# Altium PCB S1.PcbDoc
Units mil, origin at the board's own origin, x right, y up, seen from the top; angles counter-clockwise.
Board outline 2362.07 x 2362.07 mil, 2 copper layers (Top Layer, Bottom Layer), stack 61.855 mil thick; 51 components, 38 nets, 228 pads, 76 vias.
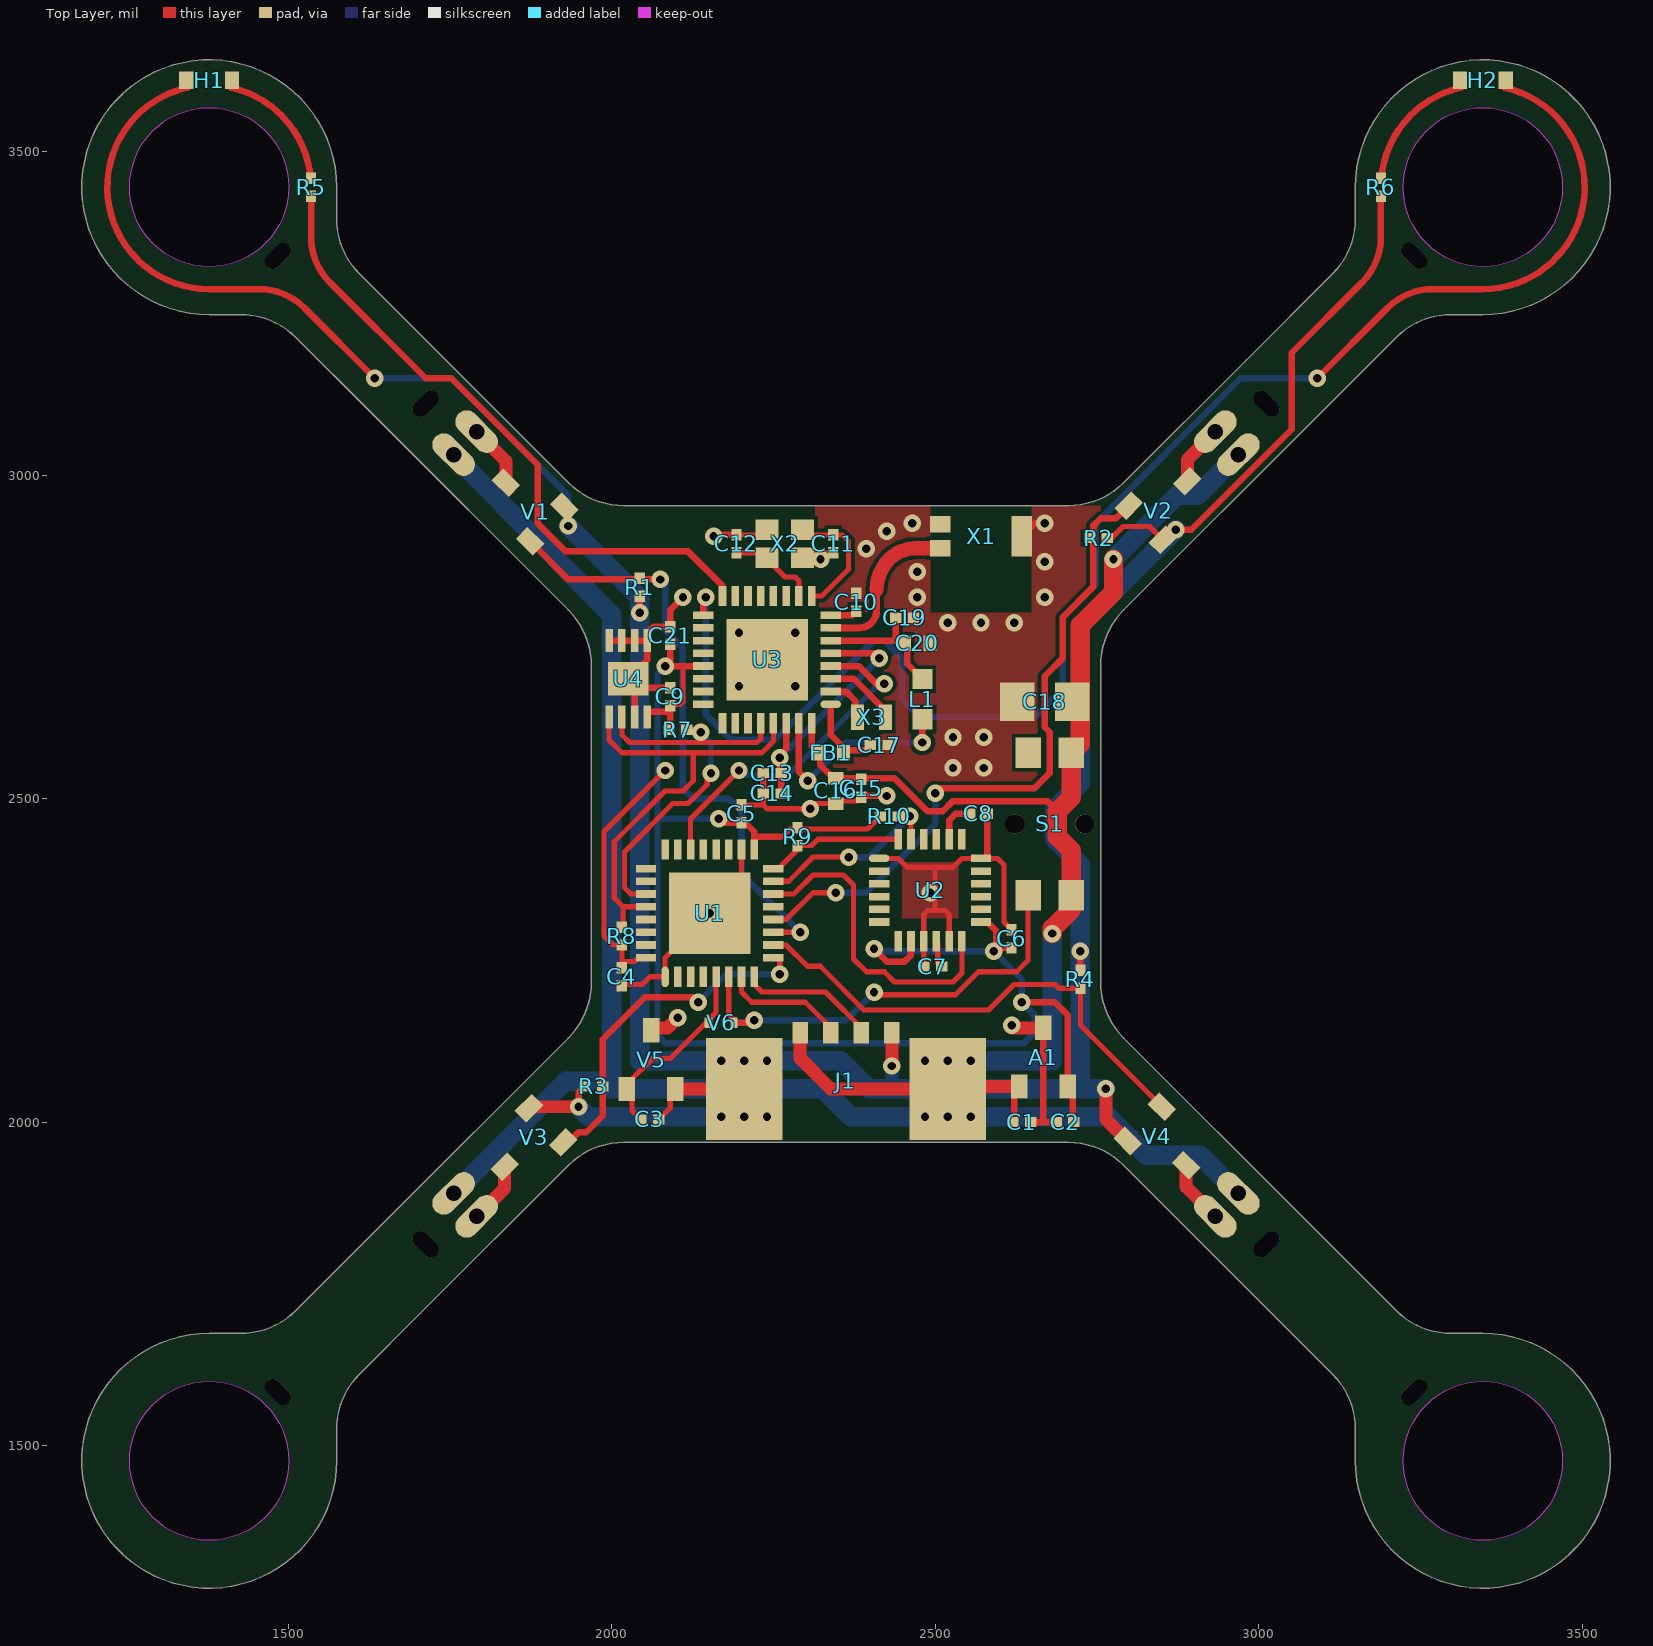
[diagram p0: Top Layer view]
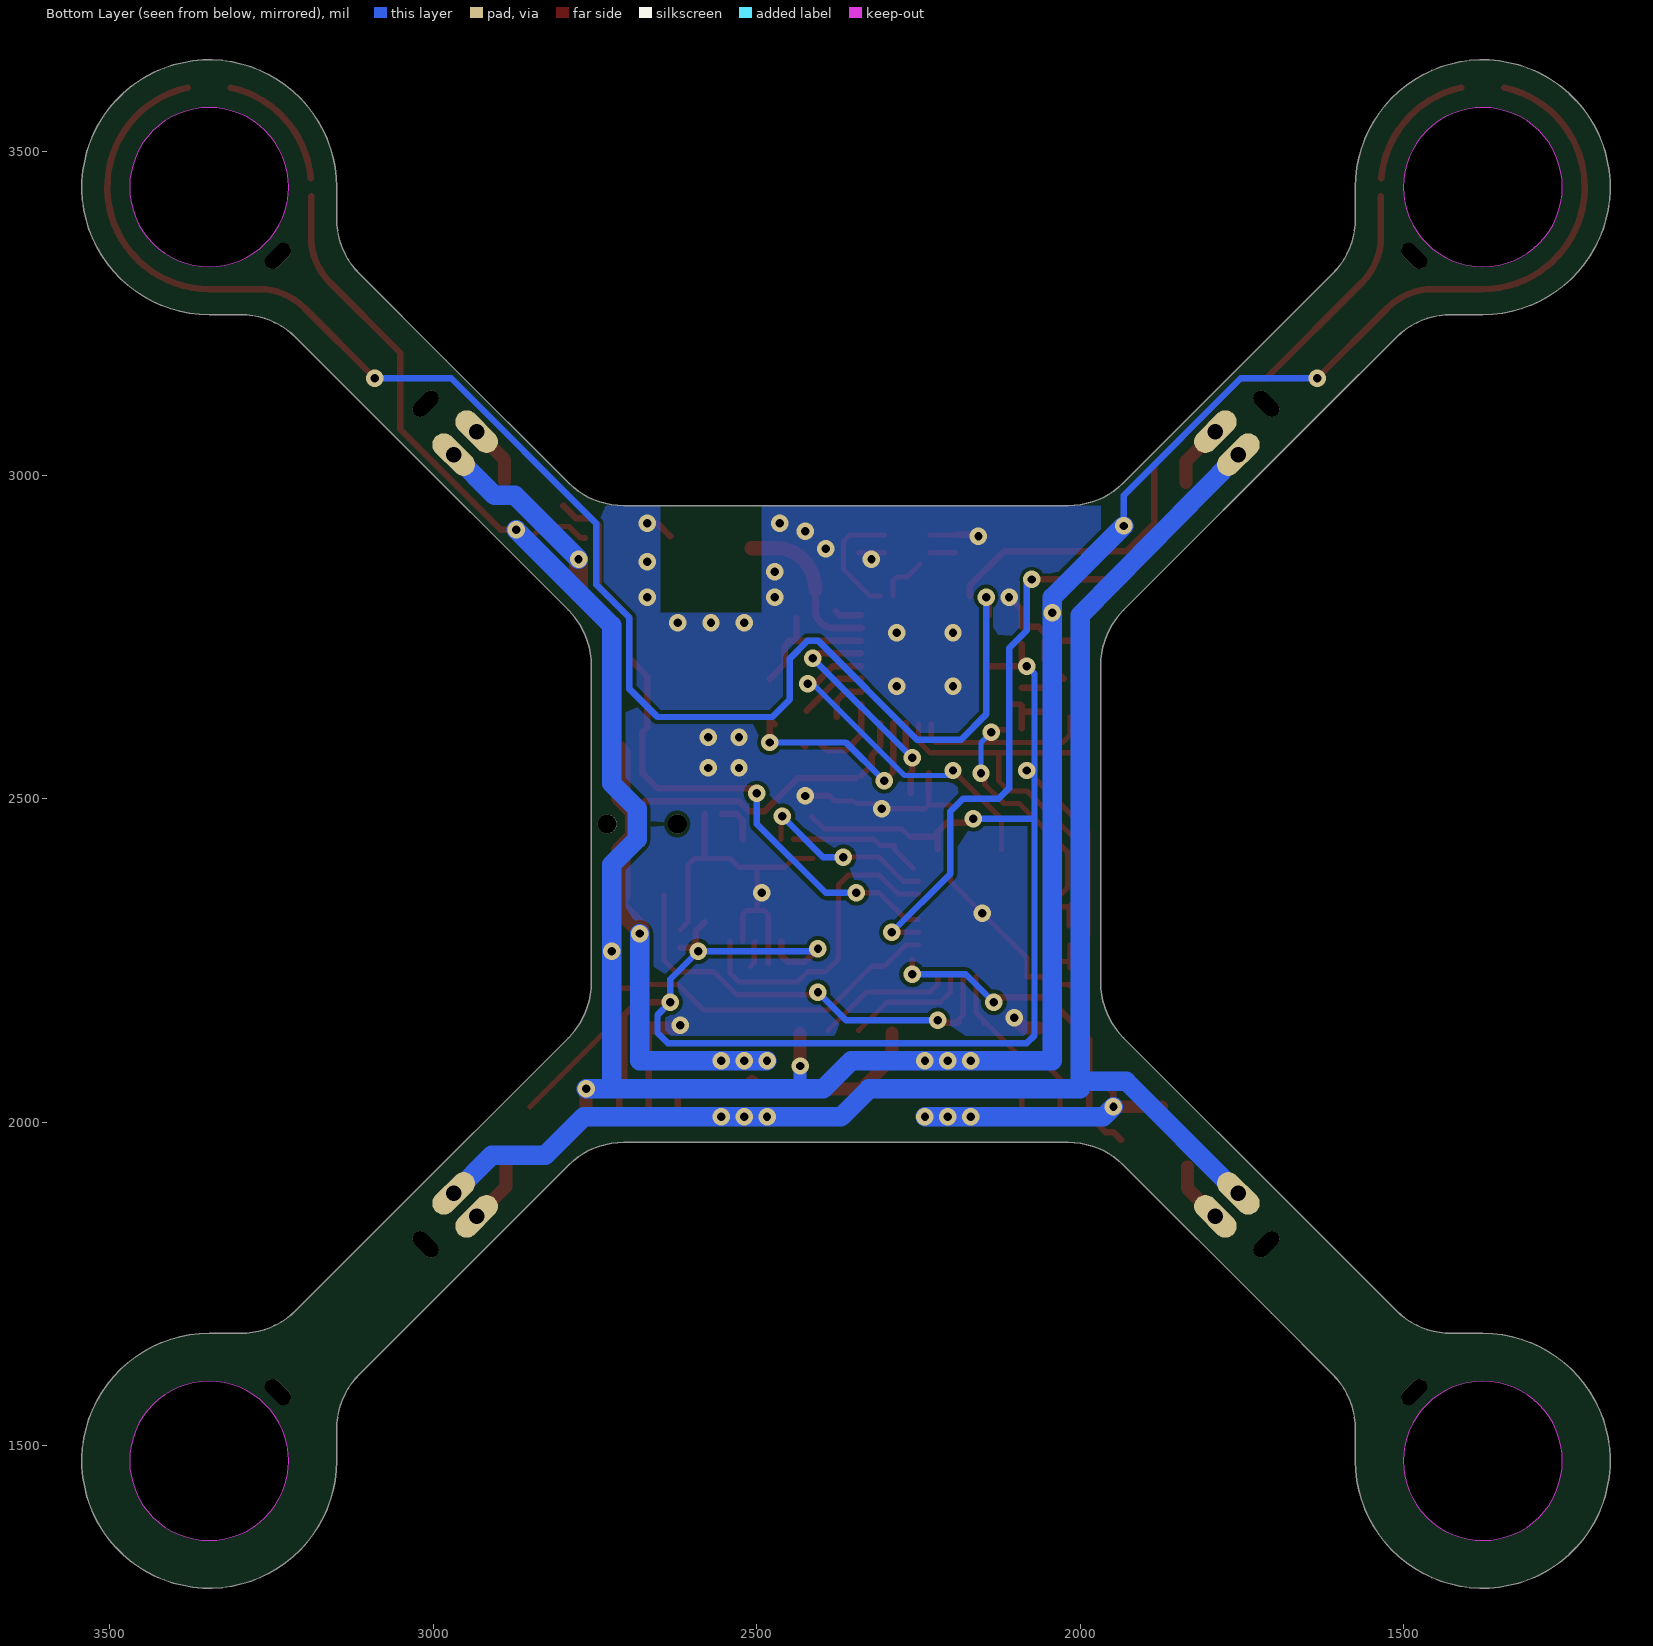
[diagram p1: Bottom Layer view, seen from below]

## Layer stack, top to bottom
Top Layer: signal copper 1.4
Dielectric: core 59.0551, FR-4, Dk 4.8
Bottom Layer: signal copper 1.4

## Board outline
1377.95,1673.23 1426.38,1673.23 ccw(c1426.38,1793.94) 1511.73,1708.58 1643.7,1840.55 1933.15,2130 ccw(c1847.79,2215.35) 1968.5,2215.35 1968.5,2705.91 ccw(c1847.79,2705.91) 1933.15,2791.26 1625.98,3098.43 1511.73,3212.68 ccw(c1426.38,3127.32) 1426.38,3248.03 1377.95,3248.03 cw(c1377.95,3444.88) 1574.8,3444.88 1574.8,3396.46 ccw(c1695.51,3396.46) 1610.16,3311.1 1692.91,3228.35 1933.15,2988.11 ccw(c2018.5,3073.47) 2018.5,2952.76 2705.91,2952.76 ccw(c2705.91,3073.47) 2791.26,2988.11 2980.32,3177.17 3114.25,3311.1 ccw(c3028.9,3396.46) 3149.61,3396.46 3149.61,3444.88 cw(c3346.46,3444.88) 3346.46,3248.03 3298.03,3248.03 ccw(c3298.03,3127.32) 3212.68,3212.68 3092.52,3092.52 2791.26,2791.26 ccw(c2876.62,2705.91) 2755.91,2705.91 2755.91,2215.35 ccw(c2876.62,2215.35) 2791.26,2130 3080.71,1840.55 3212.68,1708.58 ccw(c3298.03,1793.94) 3298.03,1673.23 3346.46,1673.23 cw(c3346.46,1476.38) 3149.61,1476.38 3149.61,1524.8 ccw(c3028.9,1524.8) 3114.25,1610.16 2994.09,1730.32 2791.26,1933.15 ccw(c2705.91,1847.79) 2705.91,1968.5 2018.5,1968.5 ccw(c2018.5,1847.79) 1933.15,1933.15 1704.72,1704.72 1610.16,1610.16 ccw(c1695.51,1524.8) 1574.8,1524.8 1574.8,1476.38 cw(c1377.95,1476.38)
cut-out: 1377.95,3321.85 cw(c1377.95,3444.88) 1254.92,3444.88 cw(c1377.95,3444.88) 1377.95,3567.91 cw(c1377.95,3444.88) 1500.98,3444.88 cw(c1377.95,3444.88)
cut-out: 3346.46,3321.85 cw(c3346.46,3444.88) 3223.43,3444.88 cw(c3346.46,3444.88) 3346.46,3567.91 cw(c3346.46,3444.88) 3469.49,3444.88 cw(c3346.46,3444.88)
cut-out: 3346.46,1353.35 cw(c3346.46,1476.38) 3223.43,1476.38 cw(c3346.46,1476.38) 3346.46,1599.41 cw(c3346.46,1476.38) 3469.49,1476.38 cw(c3346.46,1476.38)
cut-out: 1377.95,1353.35 cw(c1377.95,1476.38) 1254.92,1476.38 cw(c1377.95,1476.38) 1377.95,1599.41 cw(c1377.95,1476.38) 1500.98,1476.38 cw(c1377.95,1476.38)

## Design rules (kind name [scope] priority, off if disabled: settings)
Clearance [All] p1: gap=6
MinimumSolderMaskSliver [All] p1 off: minsoldermaskwidth=10
PolygonConnect [All] p1: connectstyle=Direct reliefconductorwidth=10 reliefentries=4 polygonreliefangle="90 Angle"
RoutingVias [All] p1: holewidth=28 width=50 viastyle="Through Hole" minholewidth=28 minwidth=50 maxholewidth=28 maxwidth=50
SilkscreenOverComponentPads [All] p1: minsilkscreentomaskgap=10
SolderMaskExpansion [All] p1: expansion=4
Width [All] p1: maxlimit=100 minlimit=8 preferedwidth=8
26 further rules are at their usual default settings.

## Components (designator, comment, footprint, x,y, rotation, side; value= is the part's Value field where it differs from the comment)
A1 "AP7333-28SA" SOT23 2629.92,2055.12 r90 top
C1 "Cap 1µF" "0201 (C)" 2633.86,2000 r0 top
C2 "Cap 1µF" "0201 (C)" 2700.79,2000 r180 top
C3 "Cap 100nF" "0201 (C)" 2059.06,2003.94 r0 top
C4 "Cap 100nF" "0201 (C)" 2015.75,2224.41 r270 top
C5 "Cap 100nF" "0201 (C)" 2200.79,2476.38 r270 top
C6 "Cap 100nF" "0201 (C)" 2618.11,2283.46 r90 top
C7 "Cap 100nF" "0201 (C)" 2496.06,2240.16 r0 top
C8 "Cap 2.2nF" "0201 (C)" 2566.93,2476.38 r0 top
C9 "Cap 100nF" "0201 (C)" 2090.55,2657.48 r90 top
C10 "Cap 470nF" "0201 (C)" 2377.95,2803.15 r90 top
C11 "Cap 15pF" "0201 (C)" 2342.52,2893.7 r90 top
C12 "Cap 8.2pF" "0201 (C)" 2192.91,2893.7 r90 top
C13 "Cap 470nF" "0201 (C)" 2248.03,2539.37 r0 top
C14 "Cap 150nF" "0201 (C)" 2248.03,2507.87 r180 top
C15 "Cap 47nF" "0201 (C)" 2385.83,2515.75 r90 top
C16 "Cap 2.2µF" "0402 (C)" 2346.46,2511.81 r90 top
C17 "Cap 33pF" "0201 (C)" 2413.39,2582.68 r180 top
C18 "Cap 47µF" "0805 (C)" 2669.29,2649.61 r0 top
C19 "Cap 470nF" "0201 (C)" 2452.76,2779.53 r180 top
C20 "Cap 2.2µF" "0402 (C)" 2472.44,2740.16 r0 top
C21 "Cap 47nF" "0201 (C)" 2090.55,2751.97 r90 top
FB1 "MMZ1005Y152C" "0402 (R)" 2338.58,2570.87 r180 top net-tie
H1 "LED1" KLTFSN2K5200 1342.52,3610.24 r0 top
H2 "LED1" KLTFSN2K5200 3311.02,3610.24 r0 top
J1 "Pico-EZMate" "PICO-EZMATE (4PIN)" 2362.2,2137.8 r0 top
L1 "L 4.7µH" "0603 (L)" 2480.32,2653.54 r270 top
R1 "Res 10k" "0201 (R)" 2043.31,2826.77 r270 top
R2 "Res 10k" "0201 (R)" 2752.56,2902.65 r180 top
R3 "Res 10k" "0201 (R)" 1972.44,2055.12 r180 top
R4 "Res 10k" "0201 (R)" 2724.41,2220.47 r270 top
R5 "Res 100R" "0201 (R)" 1535.43,3444.88 r90 top
R6 "Res 100R" "0201 (R)" 3188.98,3444.88 r270 top
R7 "Res 4k7" "0201 (R)" 2102.36,2606.3 r0 top
R8 "Res 4k7" "0201 (R)" 2015.75,2287.4 r90 top
R9 "Res 4k7" "0201 (R)" 2287.4,2440.94 r270 top
R10 "Res 4k7" "0201 (R)" 2429.13,2472.44 r0 top
S1 "TL1014BF160QG" "SWITCH RIGHT ANGLE" 2677.17,2460.63 r270 top
U1 "Xmega32E5" "QFN-32 (5X5MM)" 2082.68,2224.41 r90 top
U2 "MPU6050" "LQFN24 (4x4mm)" 2413.39,2407.48 r0 top
U3 "CSR1010" "QFN-32 (5X5MM)" 2338.58,2645.67 r180 top
U4 "AT24C512C" "UDFN-8 (3X2MM)" 2055.12,2744.09 r270 top
V1 "DMG2302U" SOT23 1874.02,2897.64 r135 top
V2 "DMG2302U" SOT23 2799.21,2952.76 r45 top
V3 "DMG2302U" SOT23 1925.2,1968.5 r225 top
V4 "DMG2302U" SOT23 2850.39,2023.62 r315 top
V5 "DMG2302U" SOT23 2023.62,2051.18 r90 top
V6 "1N4148W" SOD923 2169.29,2153.54 r0 top
X1 "W3008" "ANTENNA 3.2X1.6MM (W3008)" 2570.87,2905.51 r180 top
X2 "8Y-16.000MAAV-T" "CRYSTAL 1.6MM X 2MM" 2267.72,2893.7 r180 top
X3 "ABS05-32.768KHZ-9-T" "CRYSTAL 1MM X 1.6MM" 2401.57,2625.98 r180 top

## Footprints (in the part's own frame and the unit in brackets; to place one, negate y for a bottom-side part, rotate by r counter-clockwise, add the part's x,y. Pads: shape width x height; smd on the part's side, far side on the other; paste and mask are expansions set on the pad)
"0201 (C)" [mm]
  rect 0.45x0.4 smd: 1(-0.35,0) 2(0.35,0)
  body extent -0.35,-0.15 0.35,0.15, height 0.3
"0201 (R)" [mm]
  rect 0.45x0.4 smd: 1(-0.35,0) 2(0.35,0)
  body extent -0.35,-0.15 0.35,0.15, height 0.3
"0402 (C)" [mm]
  rect 0.5x0.6 smd: 1(-0.5,0) 2(0.5,0)
  body extent -0.5,-0.25 0.5,0.25, height 0.41
"0402 (R)" [mm]
  rect 0.5x0.6 smd: 1(-0.5,0) 2(0.5,0)
  body extent -0.5,-0.25 0.5,0.25, height 0.3
"0603 (L)" [mil]
  rect 31x31 smd: 1(-31,0) 2(31,0)
  body extent -31,-16 32,16, height 31
"0805 (C)" [mm] "Chip Resistor, 2-Leads, Body 2.0x1.3mm, IPC Low Density"
  rect 1.35x1.5 smd: 1(-1.075,0) 2(1.075,0)
  body extent -1.07,-0.7 1.08,0.7, height 1
"ANTENNA 3.2X1.6MM (W3008)" [mm]
  rect 0.8x0.65 smd: 1(1.6,0.475) 2(1.6,-0.475)
  rect 0.8x1.6 smd: 3(-1.6,0)
  body extent -1.6,-0.8 1.6,0.8, height 1.1
"CRYSTAL 1.6MM X 2MM" [mm]
  rect 0.9x0.8 smd: 1(-0.7,-0.55) 2(0.7,-0.55) 3(0.7,0.55) 4(-0.7,0.55)
  body extent -1,-0.8 1,0.8, height 0.5
"CRYSTAL 1MM X 1.6MM" [mm]
  rect 0.5x1 smd: 1(-0.55,0) 2(0.55,0)
  body extent -0.8,-0.5 0.8,0.5, height 0.5
KLTFSN2K5200 [mm]
  rect 0.56x0.68 smd: 1(1.8,0) 2(0,0)
  body extent 0,-0.35 1.83,0.75, height 0.4
"LQFN24 (4x4mm)" [mm]
  oval 0.8x0.3 smd: 1(0,0)
  rect 0.8x0.3 smd: 2(0,-0.5) 3(0,-1) 4(0,-1.5) 5(0,-2) 6(0,-2.5) 13(4,-2.5) 14(4,-2) 15(4,-1.5) 16(4,-1) 17(4,-0.5) 18(4,0)
  rect 0.3x0.8 smd: 7(0.75,-3.25) 8(1.25,-3.25) 9(1.75,-3.25) 10(2.25,-3.25) 11(2.75,-3.25) 12(3.25,-3.25) 19(3.25,0.75) 20(2.75,0.75) 21(2.25,0.75) 22(1.75,0.75) 23(1.25,0.75) 24(0.75,0.75)
  body extent 0,-3.25 4,0.75, height 0.9
"PICO-EZMATE (4PIN)" [mm]
  rect 0.7x0.8 smd: 0a(-2.95,-3.775) 0b(2.95,-3.775)
  rect 0.6x0.85 smd: 1(-1.8,0) 2(-0.6,0) 3(0.6,0) 4(1.8,0)
  body extent -3.3,-4.3 3.3,0.2, height 1.55
"QFN-32 (5X5MM)" [mm]
  rect 3.2x3.2 smd: 0(2.5,-1.75)
  oval 0.8x0.3 smd: 1(0,0)
  rect 0.8x0.3 smd: 2(0,-0.5) 3(0,-1) 4(0,-1.5) 5(0,-2) 6(0,-2.5) 7(0,-3) 8(0,-3.5) 17(5,-3.5) 18(5,-3) 19(5,-2.5) 20(5,-2) 21(5,-1.5) 22(5,-1) 23(5,-0.5) 24(5,0)
  rect 0.3x0.8 smd: 9(0.75,-4.25) 10(1.25,-4.25) 11(1.75,-4.25) 12(2.25,-4.25) 13(2.75,-4.25) 14(3.25,-4.25) 15(3.75,-4.25) 16(4.25,-4.25) 25(4.25,0.75) 26(3.75,0.75) 27(3.25,0.75) 28(2.75,0.75) 29(2.25,0.75) 30(1.75,0.75) 31(1.25,0.75) 32(0.75,0.75)
  body extent 0,-4.25 5,0.75, height 0.55
SOD923 [mm]
  rect 0.3x0.4 smd: A(0.5,0) K(-0.5,0)
  body extent -0.42,-0.3 0.43,0.3, height 0.38
SOT23 [mm]
  rect 0.95x0.65 smd: 1(0,0) 2(0,-1.9) 3(2.3,-0.95)
  body extent -0.05,-2.4 2.35,0.5, height 1.3
"SWITCH RIGHT ANGLE" [mm]
  rect 1.2x1 smd: 1(2.8,0.85) 2(2.8,-0.85) 3(-2.8,0.85) 4(-2.8,-0.85)
  round 0.75 hole 0.75 unplated: ""(0,1.375)
  oval 0.75x0.7 hole 0.75 unplated: ""(0,-1.375)
  body extent -3.2,-1.75 3.2,2.75, height 1.65
"UDFN-8 (3X2MM)" [mm]
  rect 1.3x1.6 smd: 0(1.5,-0.75)
  rect 0.9x0.3 smd: 1(0,0) 2(0,-0.5) 3(0,-1) 4(0,-1.5) 5(3,-1.5) 6(3,-1) 7(3,-0.5) 8(3,0)
  body extent 0,-1.75 3,0.25, height 0.6

## Part data
A1: "Low Dropout Regulator 2.8V, 300mA"
C1 C2: "Ceramic Capacitor 1µF"
C3 C4 C5 C6 C7 C9: "Ceramic Capacitor 100nF"
C8: "Ceramic Capacitor 2.2nF"
C10 C13 C19: "Ceramic Capacitor 470nF"
C11: "Ceramic Capacitor 15pF"
C12: "Ceramic Capacitor 8.2pF"
C14: "Ceramic Capacitor 150nF"
C15 C21: "Ceramic Capacitor 47nF"
C16 C20: "Ceramic Capacitor 2.2µF"
C17: "Ceramic Capacitor 33pF"
C18: "Ceramic Capacitor 47µF"
FB1: library part Filter, "HF Filter"
H1 H2: "Side View LED"
J1: library part "S1 Connector", "Programming & Charging Connector for S1"
L1: "Inductor 4.7µH"
R1 R2 R3 R4: "Resistor 10k"
R5 R6: "Resistor 100R"
R7 R8 R9 R10: "Resistor 4k7"
S1: "Tactile Switch, Right Angle"
U1: "8-Bit AVR Microcontroller"
U2: "9DOF Motion Processing Unit"
U3: "Bluetooth v4.0 Low Energy Chip"
U4: library part AT24C512C-MAHM, "512kbit I2C EEPROM"
V1 V2 V3 V4 V5: "MOSFET N-Channel"
V6: library part Diode, "Diode"
X1: library part "Antenna 2.4GHz", "Antenna 2.4GHz"
X2: library part "Crystal 16MHz", "Crystal 16MHz"
X3: library part "Crystal 32.768kHz", "Crystal 32.768kHz"

## Free pads (board coordinates)
  rect 118.11x157.48 smd: +(2519.68,2051.18) -(2204.72,2051.18)
  oval 47.24x23.62 hole 23.62 slot 47.24 at 135 deg unplated rot 135: ""(1484.25,1582.68) ""(1712.6,1811.02) ""(3011.81,3110.24) ""(3240.16,3338.58)
  oval 47.24x23.62 hole 23.62 slot 47.24 at 45 deg unplated rot 45: ""(1484.25,3338.58) ""(1712.6,3110.24) ""(3011.81,1811.02) ""(3240.16,1582.68)
  oval 35.43x78.74 hole 23.62 rot 45: ""(1755.91,3031.5) ""(1791.34,3066.93) ""(2933.07,1854.33) ""(2968.5,1889.76)
  oval 35.43x78.74 hole 23.62 rot 135: ""(1755.91,1889.76) ""(1791.34,1854.33) ""(2933.07,3066.93) ""(2968.5,3031.5)

## Via types
v1: diameter 27, hole 13, Top Layer to Bottom Layer, tented both sides, 76 vias

## Nets (pads, with @x,y where several pads share a name; then routed paths per layer and width w, separated by ;. In a path a pad name is that pad's centre, name@x,y a point inside that pad or via, vN(x,y) a via of type N, cw(c..) or ccw(c..) an arc to the next point about the centre after c; other vN are vias at no path point)
BAT+: A1.1 C1.1 C15.2 C16.2 C18.2 FB1.2 J1.0b J1.1 pad.+ pad.@1755.91,1889.76 pad.@1755.91,3031.5 pad.@2968.5,1889.76 pad.@2968.5,3031.5 S1.1 S1.3 U3.32 | length 4598.4
  Top Layer w10: U3.32 2309.05,2580.71 FB1.2 ; FB1.2@2322.58,2567.18 2322.58,2551.43 C16.2@2338.58,2535.43 ; C16.2 2437.01,2531.5 2488.19,2480.32 2511.81,2480.32 2527.56,2496.06 2673.23,2496.06 2688.98,2480.32 ; C1.1 2622.05,2001.97 A1.1@2622.05,2047.24
  Top Layer w20: J1.1 2291.34,2098.43 2338.58,2051.18 2496.06,2051.18 pad.+@2507.87,2062.99 ; pad.+@2523.62,2055.12 A1.1
  Top Layer w30: v1(2681.1,2291.34) 2681.1,2299.21 S1.1@2710.63,2328.74 ; S1.1 2710.63,2419.29 2688.98,2440.94 2688.98,2480.32 2710.63,2501.97 S1.3 2724.41,2584.65 2724.41,2767.72 2775.59,2818.9 v1(2775.59,2870.08)
  Bottom Layer w30: pad.@1755.91,1889.76 1929.13,2062.99 2000,2062.99 ; pad.@1755.91,3031.5 2000,2783.46 2000,2051.18 2326.77,2051.18 2370.08,2007.87 v1(2484.25,2007.87) v1(2519.69,2007.87) v1(2555.12,2007.87) 2767.72,2007.87 2826.77,1948.82 2909.45,1948.82 pad.@2968.5,1889.76 ; v1(2484.25,2094.49) v1(2519.69,2094.49) v1(2555.12,2094.49) 2681.1,2094.49 v1(2681.1,2291.34) ; v1(2775.59,2870.08) 2874.02,2968.5 2905.51,2968.5 pad.@2968.5,3031.5
BAT-: C3.2 H1.2 J1.0a J1.4 pad.- R1.2 R2.1 R3.2 R4.1 R6.2 V1.2 V2.2 V3.2 V4.2 V5.2 | length 5308.9
  Top Layer w8: C3.2 2090.55,2021.65 V5.2@2090.55,2043.31 ; R2.1@2772.73,2902.65 2790.56,2920.48 2831.48,2920.48 V2.2
  Top Layer w10: H1.2@1344.96,3598.87 ccw(c1377.95,3444.88) 1377.95,3287.4 1454.64,3287.4 cw(c1454.64,3187.4) 1525.35,3258.11 v1(1633.86,3149.61) ; v1(1948.82,2023.62) 1948.82,2045.28 R3.2 ; v1(2043.31,2787.4) R1.2 ; R4.1 v1(2724.41,2263.78) ; R2.1 R2.1@2769.05,2902.65 ; v1(2872.05,2915.35) 2895.67,2915.35 3051.18,3070.87 3051.18,3188.98 3159.69,3297.48 ccw(c3088.98,3368.19) 3188.98,3368.19 R6.2
  Top Layer w20: V3.2@1874.53,2023.62 v1(1948.82,2023.62) ; V5.2 pad.- ; v1@2433.07,2089.57 J1.4 ; v1(2763.78,2051.18) 2763.78,2004.45 V4.2
  Bottom Layer w10: v1(1633.86,3149.61) 1751.97,3149.61 1933.07,2968.5 v1(1933.07,2921.26)
  Bottom Layer w20: 2433.07,2051.18 v1(2433.07,2086.61)
  Bottom Layer w30: v1(1933.07,2921.26) 2043.31,2811.02 v1(2043.31,2787.4) 2043.31,2094.49 v1(2169.29,2094.49) v1(2204.72,2094.49) v1(2240.16,2094.49) 2354.33,2094.49 2397.64,2051.18 2433.07,2051.18 2724.41,2051.18 ; v1(1948.82,2023.62) 1964.57,2007.87 v1(2169.29,2007.87) v1(2204.72,2007.87) v1(2240.16,2007.87) ; v1(2763.78,2051.18) 2724.41,2051.18 ; v1(2872.05,2915.35) 2724.41,2767.72 2724.41,2523.62 2685.04,2484.25 2685.04,2437.01 2724.41,2397.64 v1(2724.41,2263.78) 2724.41,2051.18
GND: A1.3 C1.2 C2.2 C4.2 C5.1 C6.2 C7.1 C8.2 C9.2 C10.2 C11.1 C12.2 C13.1 C14.2 C15.1 C16.1 C17.1 C18.1 C19.1 C20.2 C21.2 U1.0 U1.1 U1.18 U2.1 U2.9 U2.11 U2.18 U3.0 U4.0 U4.1 U4.2 U4.3 U4.4 U4.7 V5.3 X1.2 X1.3 X2.2 X2.4 | length 1965.4
  Top Layer w8: C4.2 2017.72,2212.6 2047.24,2212.6 2059.06,2224.41 U1.1 2082.68,2253.93 v1(2151.58,2322.83) 2200.79,2372.04 U1.18 ; C12.2 X2.2@2232.28,2907.48 ; C5.1 2234.25,2490.16 ; C14.2 2234.25,2490.16 ; X2.4@2303.15,2879.92 C11.1 ; C16.1 2303.15,2492.13 2295.28,2484.25 2240.16,2484.25 2234.25,2490.16 ; C16.1@2350.39,2496.06 2379.92,2496.06 C15.1 ; U2.1 2442.91,2407.48 2456.69,2393.7 2500,2393.7 ; C7.1@2482.28,2244.09 U2.9 2482.28,2320.87 2488.19,2326.77 2500,2326.77 ; U2.11 2521.65,2320.87 2515.75,2326.77 2500,2326.77 ; C6.2 2606.3,2309.06 2606.3,2397.64 2596.46,2407.48 U2.18 2541.34,2407.48 2527.56,2393.7 2500,2393.7 ; 2500,2326.77 2500,2393.7
  Top Layer w10: U4.4 U4.3 U4.2 U4.1 2055.12,2714.57 U4.0 ; U4.7 U4.0@2035.43,2675.2 ; U4.0@2039.37,2671.26 C9.2 ; U4.1@2055.12,2755.91 2064.96,2765.75 C21.2 2090.55,2791.34 v1(2110.24,2811.02) ; v1(2157.48,2905.51) 2159.45,2907.48 C12.2 ; C14.2 C13.1 ; C15.1@2387.8,2503.94 v1(2425.2,2503.94) ; C17.1@2425.2,2580.71 C17.1 ; U2.18@2580.71,2409.45 C8.2 ; X1.3 2653.54,2925.2 v1(2669.29,2925.2) ; C1.2 C2.2 ; 2667.32,2001.97 A1.3
  Top Layer w20: V5.3@2064.96,2145.67 2086.61,2145.67 v1(2102.36,2161.42) ; v1@2618.11,2145.67 A1.3
  other v1: 2618.11,2149.61 2492.13,2354.33 2307.09,2484.25 2527.56,2547.24 2574.8,2547.24 2527.56,2594.49 2574.8,2594.49 2196.85,2673.23 2283.46,2673.23 2196.85,2755.91 2283.46,2755.91 2519.68,2771.65 2570.87,2771.65 2622.05,2771.65 2472.44,2811.02 2669.29,2811.02 2472.44,2850.39 2669.29,2866.14 2322.83,2870.08 2393.7,2885.83 2425.2,2913.39 2464.57,2925.2
NetC3_1: C3.1 U1.5 V5.1 V6.K | length 287.6
  Top Layer w8: V5.1@2023.62,2059.05 2062.99,2098.43 2090.55,2098.43 V6.K@2145.67,2153.54 ; V5.1@2031.5,2043.31 2031.5,2017.72 C3.1 ; V6.K V6.K@2145.67,2153.54 ; U1.5 2161.42,2169.29 V6.K@2145.67,2153.54
NetC7_2: C7.2 U2.10 | length 42.6
  Top Layer w8: U2.10 2503.94,2277.56 2503.94,2246.06 C7.2
NetC8_1: C8.1 U2.20 | length 65.1
  Top Layer w10: U2.20 2521.65,2466.54 2531.5,2476.38 C8.1
NetC10_1: C10.1 U3.8 | length 41.8
  Top Layer w10: U3.8 2372.05,2783.46 C10.1
NetC11_2: C11.2 U3.9 X2.1 | length 184.6
  Top Layer w8: X2.1@2303.15,2907.48 C11.2 2356.3,2907.48 2366.14,2897.64 2366.14,2854.33 2324.8,2812.99 U3.9
NetC12_1: C12.1 U3.10 X2.3 | length 114.9
  Top Layer w8: C12.1 X2.3@2232.28,2879.92 ; X2.3@2248.03,2862.2 2267.72,2842.52 2283.46,2842.52 2289.37,2836.61 U3.10
NetC17_2: C17.2 FB1.1 U3.1 | length 121.3
  Top Layer w10: U3.1 2338.58,2598.43 2362.2,2574.8 2391.73,2574.8 C17.2
NetC19_2: C19.2 C20.1 L1.1 U3.6 | length 212.7
  Top Layer w10: U3.6 C20.1@2450.79,2744.09 ; 2438.98,2746.06 C19.2 ; C20.1 2456.69,2736.22 2456.69,2708.17 L1.1
NetH1_1: H1.1 R5.2 | length 200.4
  Top Layer w10: H1.1@1410.95,3598.87 cw(c1377.95,3444.88) R5.2@1534.83,3458.61
NetH2_1: H2.1 U3.17 | length 2422.3
  Top Layer w10: U3.17 v1@2141.73,2807.09 ; v1(3090.55,3149.61) 3199.06,3258.11 cw(c3269.77,3187.4) 3269.77,3287.4 3346.46,3287.4 ccw(c3346.46,3444.88) H2.1@3379.45,3598.87
  Bottom Layer w10: v1(2145.67,2811.02) 2145.67,2629.92 2185.04,2590.55 2251.97,2590.55 2405.51,2744.09 2421.26,2744.09 2448.82,2716.54 2448.82,2653.54 2476.38,2625.98 2653.54,2625.98 2696.85,2669.29 2696.85,2779.53 2748.03,2830.71 2748.03,2925.2 2972.44,3149.61 v1(3090.55,3149.61)
NetH2_2: H2.2 R6.1 | length 200.4
  Top Layer w10: R6.1@3189.58,3458.61 cw(c3346.46,3444.88) H2.2@3313.46,3598.87
NetL1_2: L1.2 U3.31 | length 343
  Top Layer w10: U3.31 2289.37,2541.34 v1(2303.15,2527.56) ; L1.2@2472.44,2614.67 L1.2 v1(2480.32,2586.61)
  Bottom Layer w10: v1(2303.15,2527.56) 2362.2,2586.61 v1(2480.32,2586.61)
NetR1_1: R1.1 U1.11 V1.1 | length 938.5
  Top Layer w8: U1.11 v1(2291.34,2293.31)
  Top Layer w10: V1.1 1933.07,2838.58 v1@2082.68,2838.58
  Bottom Layer w10: v1@2082.68,2838.58 2082.68,2759.84 2110.24,2732.28 2110.24,2515.75 2125.98,2500 2181.1,2500 2200.79,2480.32 2200.79,2383.86 v1(2291.34,2293.31)
  other v1: 2074.8,2838.58
NetR2_2: R2.2 U1.12 V2.1 | length 1025.7
  Top Layer w8: U1.12 2269.68,2312.99 2311.02,2354.33 v1(2346.46,2354.33)
  Top Layer w10: v1@2503.94,2515.75 2653.54,2515.75 2677.17,2539.37 2677.17,2602.36 2669.29,2610.24 2669.29,2688.98 2696.85,2716.54 2696.85,2779.53 2744.09,2826.77 2744.09,2921.26 2755.91,2933.07 2779.53,2933.07 V2.1
  Bottom Layer w10: v1(2346.46,2354.33) 2393.7,2354.33 2500,2460.63 v1(2500,2507.87)
NetR3_1: R3.1 U1.9 V3.1 | length 528.2
  Top Layer w8: v1(2259.84,2228.35) U1.9@2259.84,2251.97
  Top Layer w10: V3.1@1937.01,1972.44 1948.82,1984.25 1960.63,1984.25 1986.22,2009.84 1986.22,2127.95 2051.18,2192.91 2125.98,2192.91 v1(2133.86,2185.04)
  Bottom Layer w10: v1(2133.86,2185.04) 2177.17,2228.35 v1(2259.84,2228.35)
NetR4_2: R4.2 U1.10 V4.1 | length 770
  Top Layer w8: U1.10 2269.69,2273.62 2302.66,2240.65 2322.34,2240.65 2389.76,2173.23 2582.68,2173.23 2622.05,2212.6 2685.04,2212.6 2690.94,2206.69 R4.2 2724.41,2149.61 V4.1
NetR5_1: R5.1 U3.16 | length 1010.9
  Top Layer w10: R5.1 1535.43,3368.19 ccw(c1635.43,3368.19) 1564.72,3297.48 1712.6,3149.61 1751.97,3149.61 1885.83,3015.75 1885.83,2925.2 1929.13,2881.89 2118.11,2881.89 2171.26,2828.74 U3.16
NetR7_2: R7.2 U1.27 U3.28 U4.6 | length 636
  Top Layer w8: U4.6 2015.75,2598.43 2027.56,2586.61 2224.41,2586.61 2230.32,2592.52 U3.28 ; U1.27 2029.53,2352.36 2019.68,2362.2 2019.68,2417.32 2094.49,2492.13 2118.11,2492.13 2147.64,2521.65 v1@2147.64,2533.46 ; R7.2 v1@2133.86,2606.3
  Bottom Layer w8: v1(2137.8,2602.36) 2153.54,2586.61 v1(2153.54,2539.37)
NetR8_2: R8.2 U1.28 U3.29 U4.5 | length 708
  Top Layer w8: U4.5 1996.06,2590.55 2015.75,2570.87 2232.28,2570.87 2250,2588.58 U3.29 ; R8.2@2017.72,2303.15 2017.72,2332.68 ; U1.28 2017.72,2332.68 ; 2125.98,2570.87 2125.98,2527.56 2110.24,2511.81 2082.68,2511.81 2003.94,2433.07 2003.94,2346.46 2017.72,2332.68
NetR9_2: R9.2 U1.16 U2.24 | length 207.3
  Top Layer w8: U1.16@2257.87,2391.73 2287.4,2421.26 R9.2 2309.06,2427.17 2318.9,2437.01 U2.24
NetR10_2: R10.2 U1.15 U2.23 | length 285.7
  Top Layer w8: U1.15 2273.62,2372.05 2311.02,2409.45 v1(2366.14,2409.45) ; U2.23 v1@2462.6,2470.47
  Bottom Layer w10: v1(2366.14,2409.45) 2397.64,2409.45 v1(2460.63,2472.44)
NetS1_2: S1.2 U1.6 V6.A | length 657.4
  Top Layer w8: U1.6 2181.1,2165.35 V6.A@2188.98,2157.48 ; v1@2409.45,2196.85 2531.5,2196.85 2566.93,2232.28 2625.98,2232.28 2643.7,2250 S1.2
  Top Layer w10: V6.A v1@2216.54,2153.54
  Bottom Layer w10: v1(2220.47,2157.48) 2362.2,2157.48 v1(2405.51,2200.79)
NetU1_14: U1.14 U2.12 | length 493.9
  Top Layer w8: U1.14 2281.5,2352.36 2311.02,2381.89 2358.27,2381.89 2374.02,2366.14 2374.02,2251.97 2393.7,2232.28 2421.26,2232.28 2437.01,2216.54 2527.56,2216.54 2541.34,2230.32 U2.12
NetU1_22: U1.22 U3.4 | length 521.5
  Top Layer w8: U1.22 2122.05,2468.5 v1(2196.85,2543.31)
  Top Layer w10: U3.4 2381.89,2704.72 v1@2414.86,2671.76
  Bottom Layer w8: v1(2196.85,2543.31) 2204.72,2535.43 2271.65,2535.43 v1@2413.39,2677.17
  other v1: 2421.26,2677.17
NetU3_2: U3.2 X3.2 | length 68.9
  Top Layer w10: U3.2 2362.2,2665.35 2376.35,2651.21 X3.2@2376.35,2625.98
NetU3_3: U3.3 X3.1 | length 105
  Top Layer w10: U3.3 2374.02,2685.04 X3.1@2423.23,2635.83
NetU3_7: U3.7 X1.1 | length 254.1
  Top Layer w11: U3.7 2382.56,2763.78 ccw(c2382.56,2790.66) 2401.57,2771.65 ccw(c2382.57,2790.66) 2409.45,2790.66 2409.45,2822.55
  Top Layer w22: 2409.45,2822.55 cw(c2476.66,2822.55) 2429.13,2870.08 cw(c2469.53,2829.68) 2469.53,2886.81 X1.1
NetV1_3: pad.@1791.34,3066.93 V1.3 | length 97.5
  Top Layer w20: pad.@1791.34,3066.93 1836.43,3021.83 V1.3
NetV2_3: pad.@2933.07,3066.93 V2.3 | length 94.6
  Top Layer w20: V2.3 2889.69,3023.55 pad.@2933.07,3066.93
NetV3_3: pad.@1791.34,1854.33 V3.3 | length 94.6
  Top Layer w20: pad.@1791.34,1854.33 1834.72,1897.71 V3.3
NetV4_3: pad.@2933.07,1854.33 V4.3 | length 97.5
  Top Layer w20: V4.3 2887.98,1899.43 pad.@2933.07,1854.33
PDI_CLK: J1.3 U1.8 | length 210.5
  Top Layer w8: U1.8 2220.47,2212.6 2232.28,2200.79 2330.71,2200.79 J1.3@2389.76,2141.73
PDI_DATA: J1.2 U1.7 | length 189.8
  Top Layer w8: U1.7 2200.79,2200.79 2216.54,2185.04 2299.21,2185.04 J1.2@2342.52,2141.73
VCC: A1.2 C2.1 C4.1 C5.2 C6.1 C9.1 C21.1 R7.1 R8.1 R9.1 R10.1 U1.17 U1.32 U2.8 U2.13 U3.21 U4.8 | length 2918.1
  Top Layer w8: C4.1 2015.75,2248.03 ; U1.32 2041.34,2253.94 2035.43,2248.03 2015.75,2248.03 ; v1(2082.68,2543.31) 1988.19,2448.82 1988.19,2287.4 2001.97,2273.62 R8.1 2015.75,2248.03 ; C9.1 2092.52,2645.67 2106.3,2645.67 2110.24,2649.61 2110.24,2704.72 ; 2263.78,2440.94 2275.59,2452.76 2395.67,2452.76 R10.1
  Top Layer w10: U4.8@2055.12,2633.86 2090.55,2633.86 ; R7.1@2090.55,2608.27 2090.55,2633.86 ; C9.1 2090.55,2633.86 ; v1@2090.55,2706.69 C21.1 ; v1@2092.52,2704.72 2110.24,2704.72 U3.21 ; v1@2165.35,2462.6 C5.2 2206.69,2462.6 2220.47,2448.82 U1.17 ; 2221.63,2440.94 2259.84,2440.94 ; v1(2405.51,2267.72) 2425.2,2248.03 2452.76,2248.03 2462.6,2257.87 U2.8 ; U2.13@2580.71,2309.06 2594.49,2295.28 2594.49,2276.47 2601.27,2269.69 C6.1 ; v1(2633.86,2185.04) 2685.04,2185.04 2704.72,2165.35 A1.2 ; A1.2@2712.6,2047.24 2712.6,2001.97 C2.1
  Bottom Layer w10: v1(2082.68,2704.72) 2070.87,2692.91 2070.87,2468.5 ; v1(2165.35,2468.5) 2070.87,2468.5 ; v1@2405.51,2263.78 v1(2590.55,2263.78) 2633.86,2220.47 v1(2633.86,2185.04) 2653.54,2165.35 2653.54,2137.8 2637.8,2122.05 2082.68,2122.05 2070.87,2133.86 2070.87,2468.5
VDD_CORE: C13.2 C14.1 U3.5 U3.30 | length 402
  Top Layer w8: C13.2@2259.84,2543.31 C13.2@2263.78,2539.37
  Top Layer w10: C13.2@2259.84,2543.31 v1(2259.84,2562.99) ; v1@2259.84,2566.93 2269.68,2576.77 U3.30 ; C14.1 C13.2 ; U3.5 v1@2413.39,2724.41
  Bottom Layer w10: v1(2259.84,2562.99) v1(2413.39,2716.54)
pads on no net: S1. S1.4 U1.2 U1.3 U1.4 U1.13 U1.19 U1.20 U1.21 U1.23 U1.24 U1.25 U1.26 U1.29 U1.30 U1.31 U2.2 U2.3 U2.4 U2.5 U2.6 U2.7 U2.14 U2.15 U2.16 U2.17 U2.19 U2.21 U2.22 U3.11 U3.12 U3.13 U3.14 U3.15 U3.18 U3.19 U3.20 U3.22 U3.23 U3.24 U3.25 U3.26 U3.27

## Polygon pours and split planes (outlines as drawn)
GND on Top Layer "Bottom Layer-No Net" (solid, remove dead copper, pour order 2): 2448.82,2314.96 2448.82,2401.57 2535.43,2401.57 2535.43,2314.96
GND on Top Layer "Bottom Layer-No Net" (solid, remove dead copper, pour order 3): 2492.13,2952.76 2492.13,2787.4 2649.61,2787.4 2649.61,2952.76 2755.91,2952.76 2755.91,2500 2314.96,2500 2314.96,2952.76
GND on Bottom Layer "Bottom Layer-No Net" (solid, remove dead copper, pour order 5): 1968.5,1968.5 2755.91,1968.5 2755.91,2952.76 2649.61,2952.76 2649.61,2787.4 2492.13,2787.4 2492.13,2952.76 1968.5,2952.76

## Silkscreen, mask and mechanical layers (free items; w line width, h text height)
Mechanical 1:
  circle w10: c3346.46,1476.38 r905.51
  circle w10: c1377.95,1476.38 r905.51
  circle w10: c1377.95,3444.88 r905.51
  circle w10: c3346.46,3444.88 r905.51
Board Outline:
  circle w7.87: c1377.95,3444.88 r123.03
  circle w7.87: c3346.46,3444.88 r123.03
  circle w7.87: c3346.46,1476.38 r123.03
  circle w7.87: c1377.95,1476.38 r123.03
  lines w7.87: 1377.95,1673.23 ccw(c1377.95,1476.38) 1574.8,1476.38 1574.8,1524.8 cw(c1695.51,1524.8) 1610.16,1610.16 1704.72,1704.72 1933.15,1933.15 cw(c2018.5,1847.79) 2018.5,1968.5 2535.43,1968.5 2705.91,1968.5 cw(c2705.91,1847.79) 2791.26,1933.15 2994.09,1730.32 3114.25,1610.16 cw(c3028.9,1524.8) 3149.61,1524.8 3149.61,1476.38 ccw(c3346.46,1476.38) 3346.46,1673.23 3298.03,1673.23 cw(c3298.03,1793.94) 3212.68,1708.58 3080.71,1840.55 2791.26,2130 cw(c2876.62,2215.35) 2755.91,2215.35 2755.91,2523.62 2755.91,2705.91 cw(c2876.62,2705.91) 2791.26,2791.26 3092.52,3092.52 3212.68,3212.68 cw(c3298.03,3127.32) 3298.03,3248.03 3346.46,3248.03 ccw(c3346.46,3444.88) 3149.61,3444.88 3149.61,3396.46 cw(c3028.9,3396.46) 3114.25,3311.1 2980.32,3177.17 2791.26,2988.11 cw(c2705.91,3073.47) 2705.91,2952.76 2267.72,2952.76 2018.5,2952.76 cw(c2018.5,3073.47) 1933.15,2988.11 1692.91,3228.35 1610.16,3311.1 cw(c1695.51,3396.46) 1574.8,3396.46 1574.8,3444.88 ccw(c1377.95,3444.88) 1377.95,3248.03 1426.38,3248.03 cw(c1426.38,3127.32) 1511.73,3212.68 1625.98,3098.43 1933.15,2791.26 cw(c1847.79,2705.91) 1968.5,2705.91 1968.5,2531.5 1968.5,2215.35 cw(c1847.79,2215.35) 1933.15,2130 1643.7,1840.55 1511.73,1708.58 cw(c1426.38,1793.94) 1426.38,1673.23 1377.95,1673.23
Mechanical Drawing:
  lines w4: 1988.19,1988.19 2736.22,2736.22 ; 1988.19,2185.04 2736.22,2933.07 ; 1988.19,2736.22 2716.54,2007.87 ; 1990.16,2931.1 2736.22,2185.04

## Dimensions
1254.92,3444.88 to 0,0 on Mechanical Drawing
2018.5,2952.76 to 2018.5,1968.5 on Mechanical Drawing
1968.5,2705.91 to 2755.91,2705.91 on Mechanical Drawing
1181.1,3444.88 to 1574.8,3444.88 on Mechanical Drawing
1181.1,3444.88 to 3543.31,3444.88 on Mechanical Drawing